# Altium PCB MotorControl-V4.0.PcbDoc (part 1 of 2)
Units mm, origin at the board's own origin, x right, y up, seen from the top; angles counter-clockwise.
Board outline 110 x 100 mm, 4 copper layers (Top Layer, GND-A, VCC-A, Bottom Layer); 241 components, 149 nets, 694 pads, 355 vias.
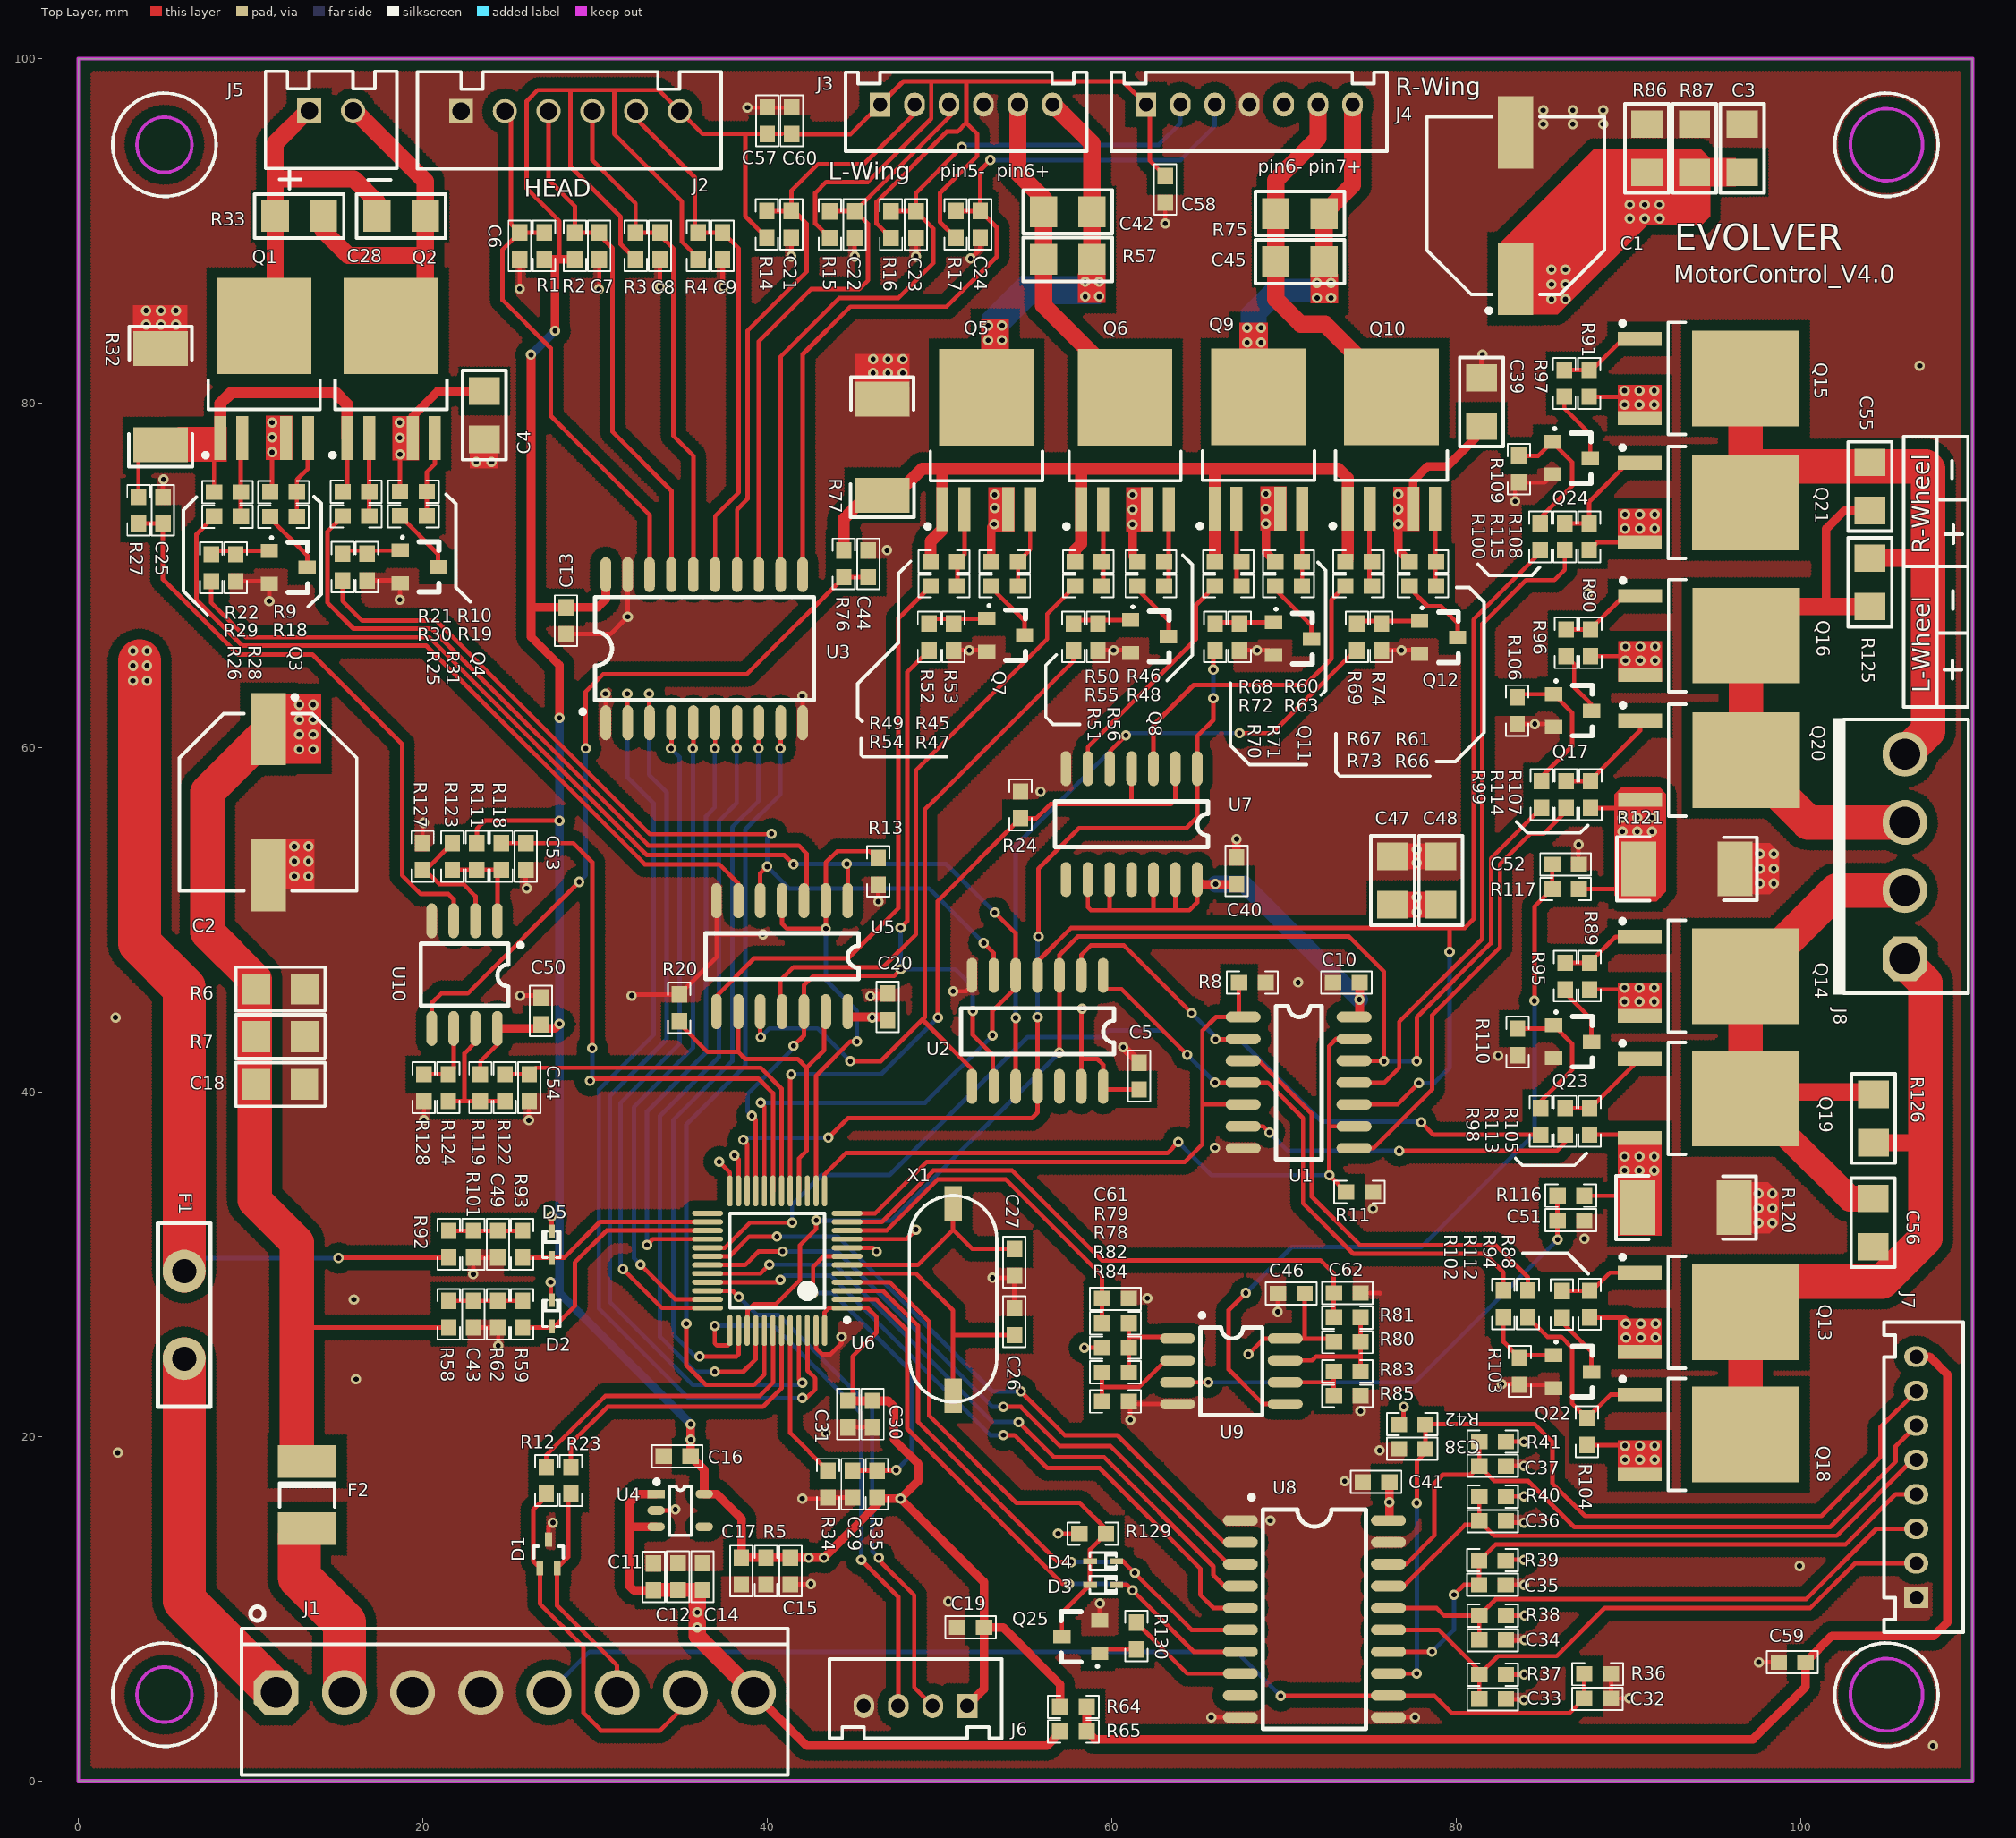
[diagram p0: Top Layer view]
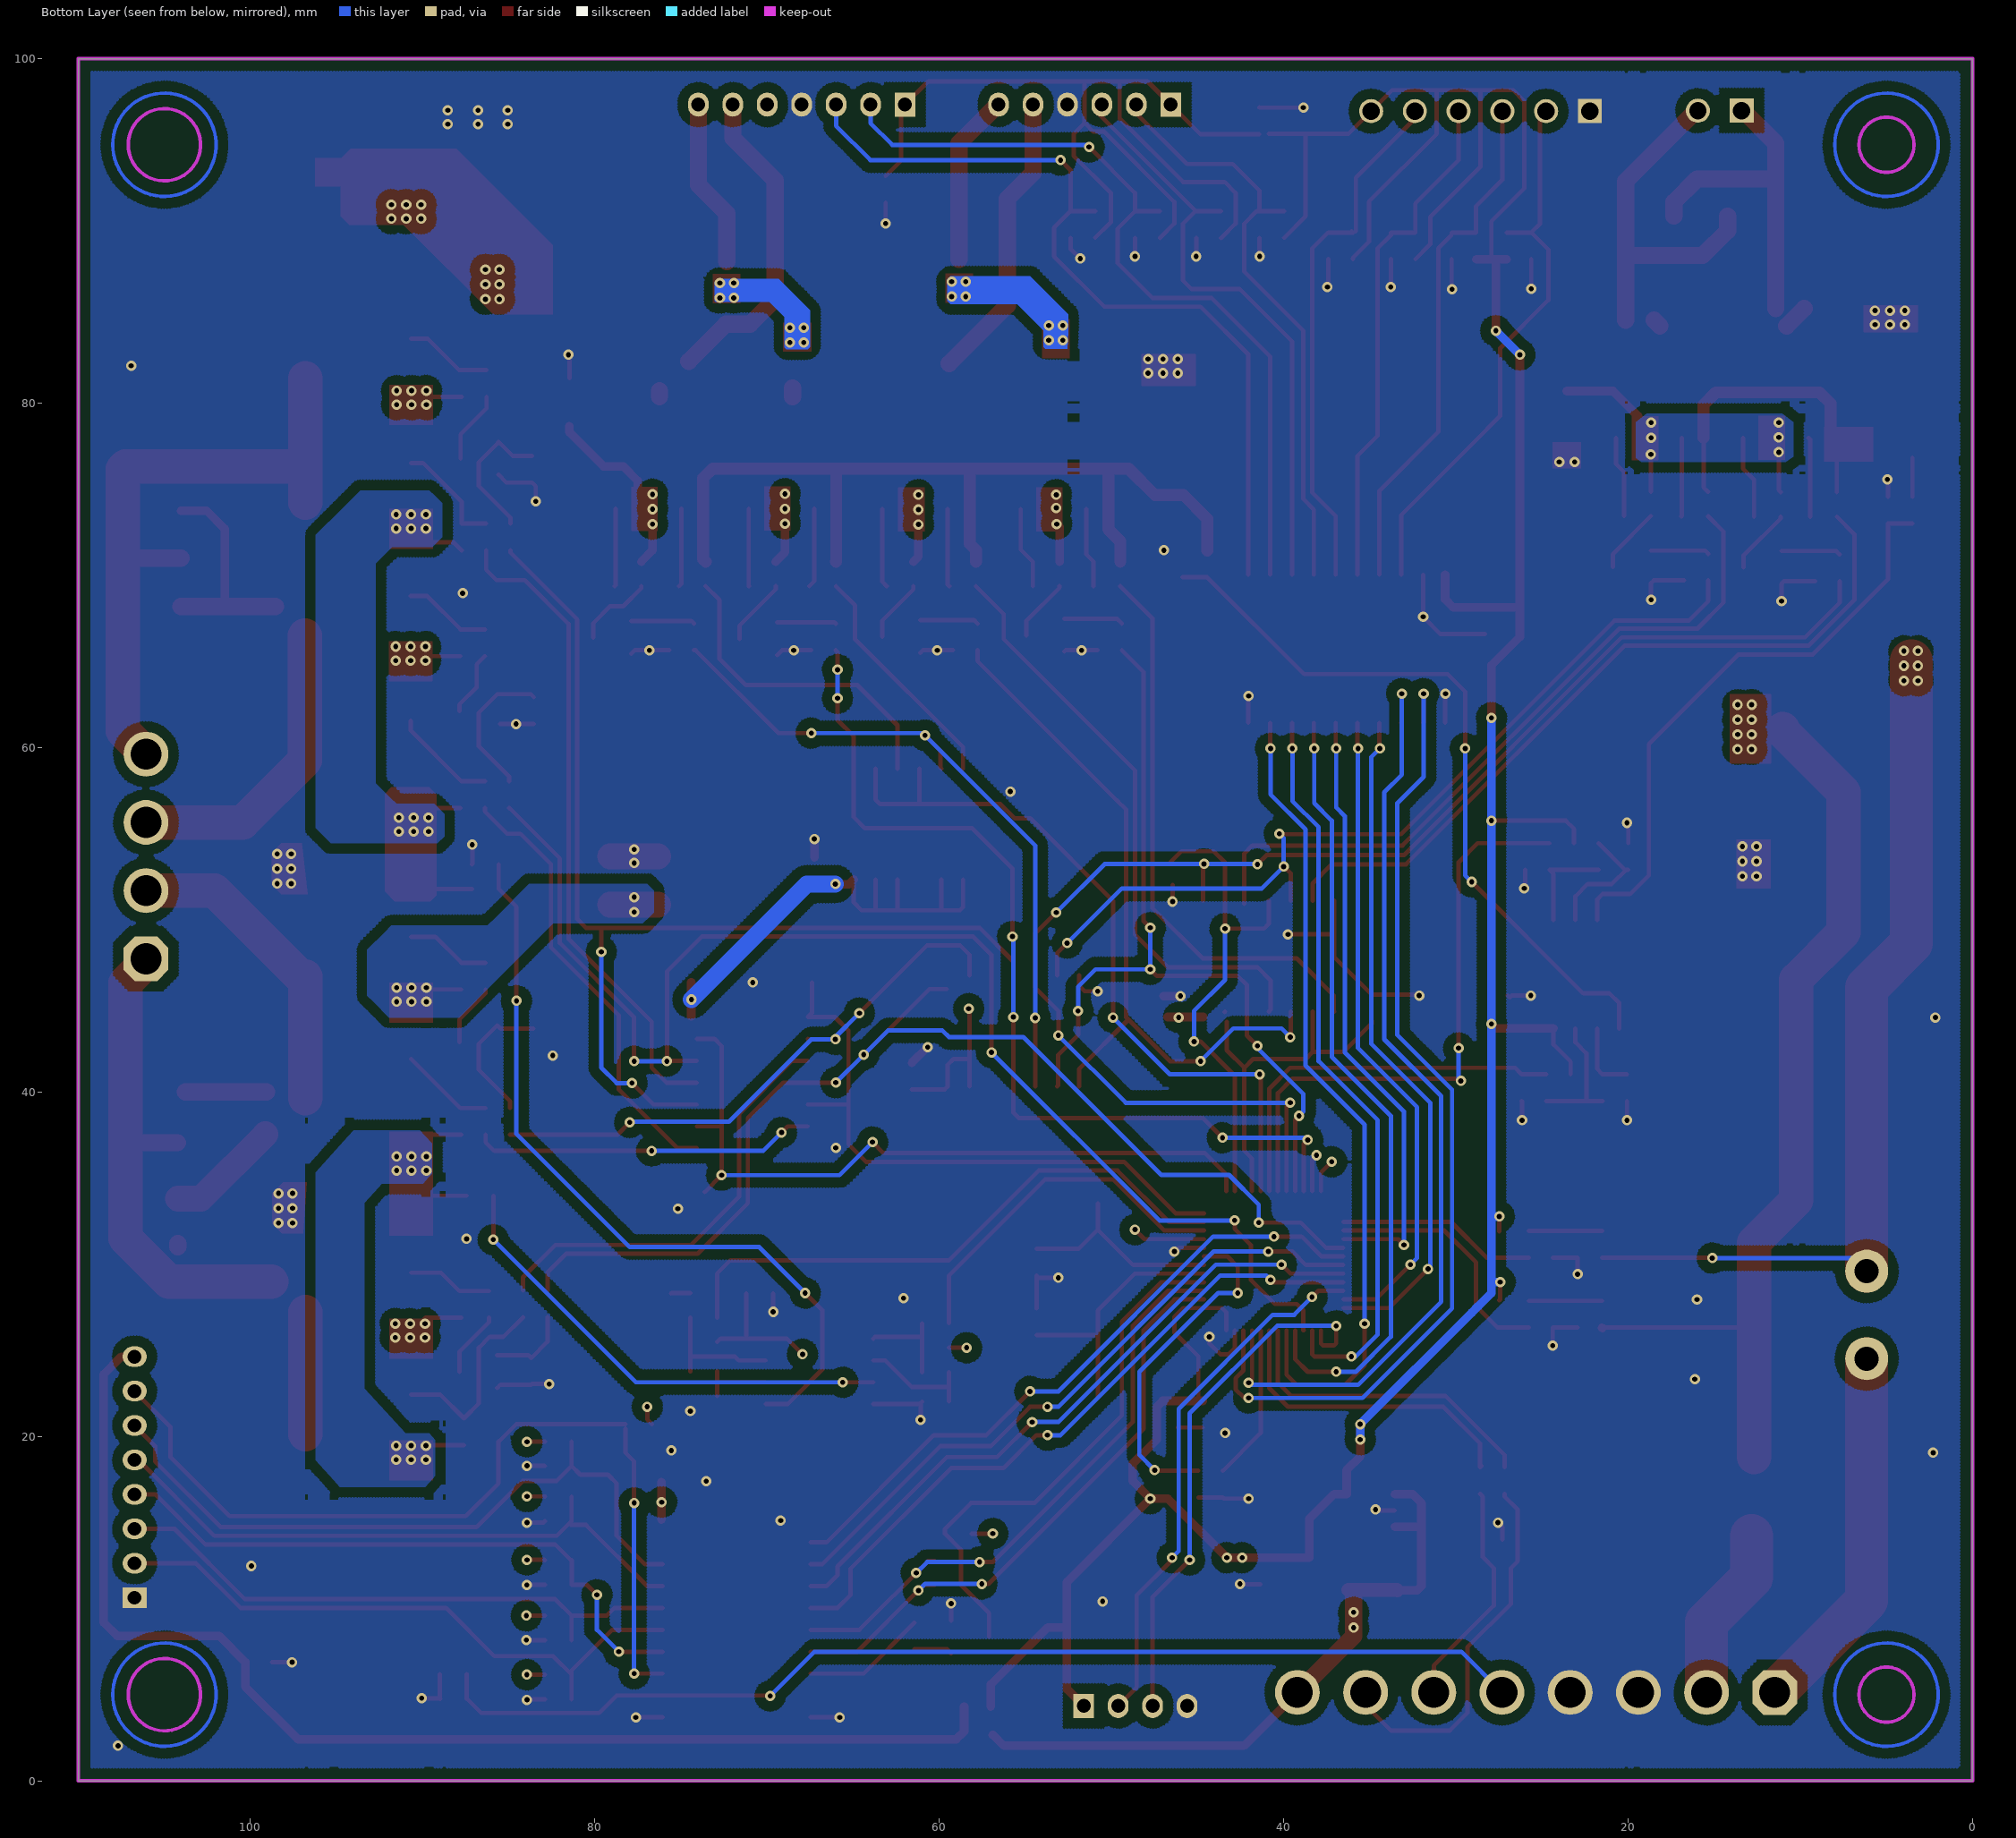
[diagram p1: Bottom Layer view, seen from below]
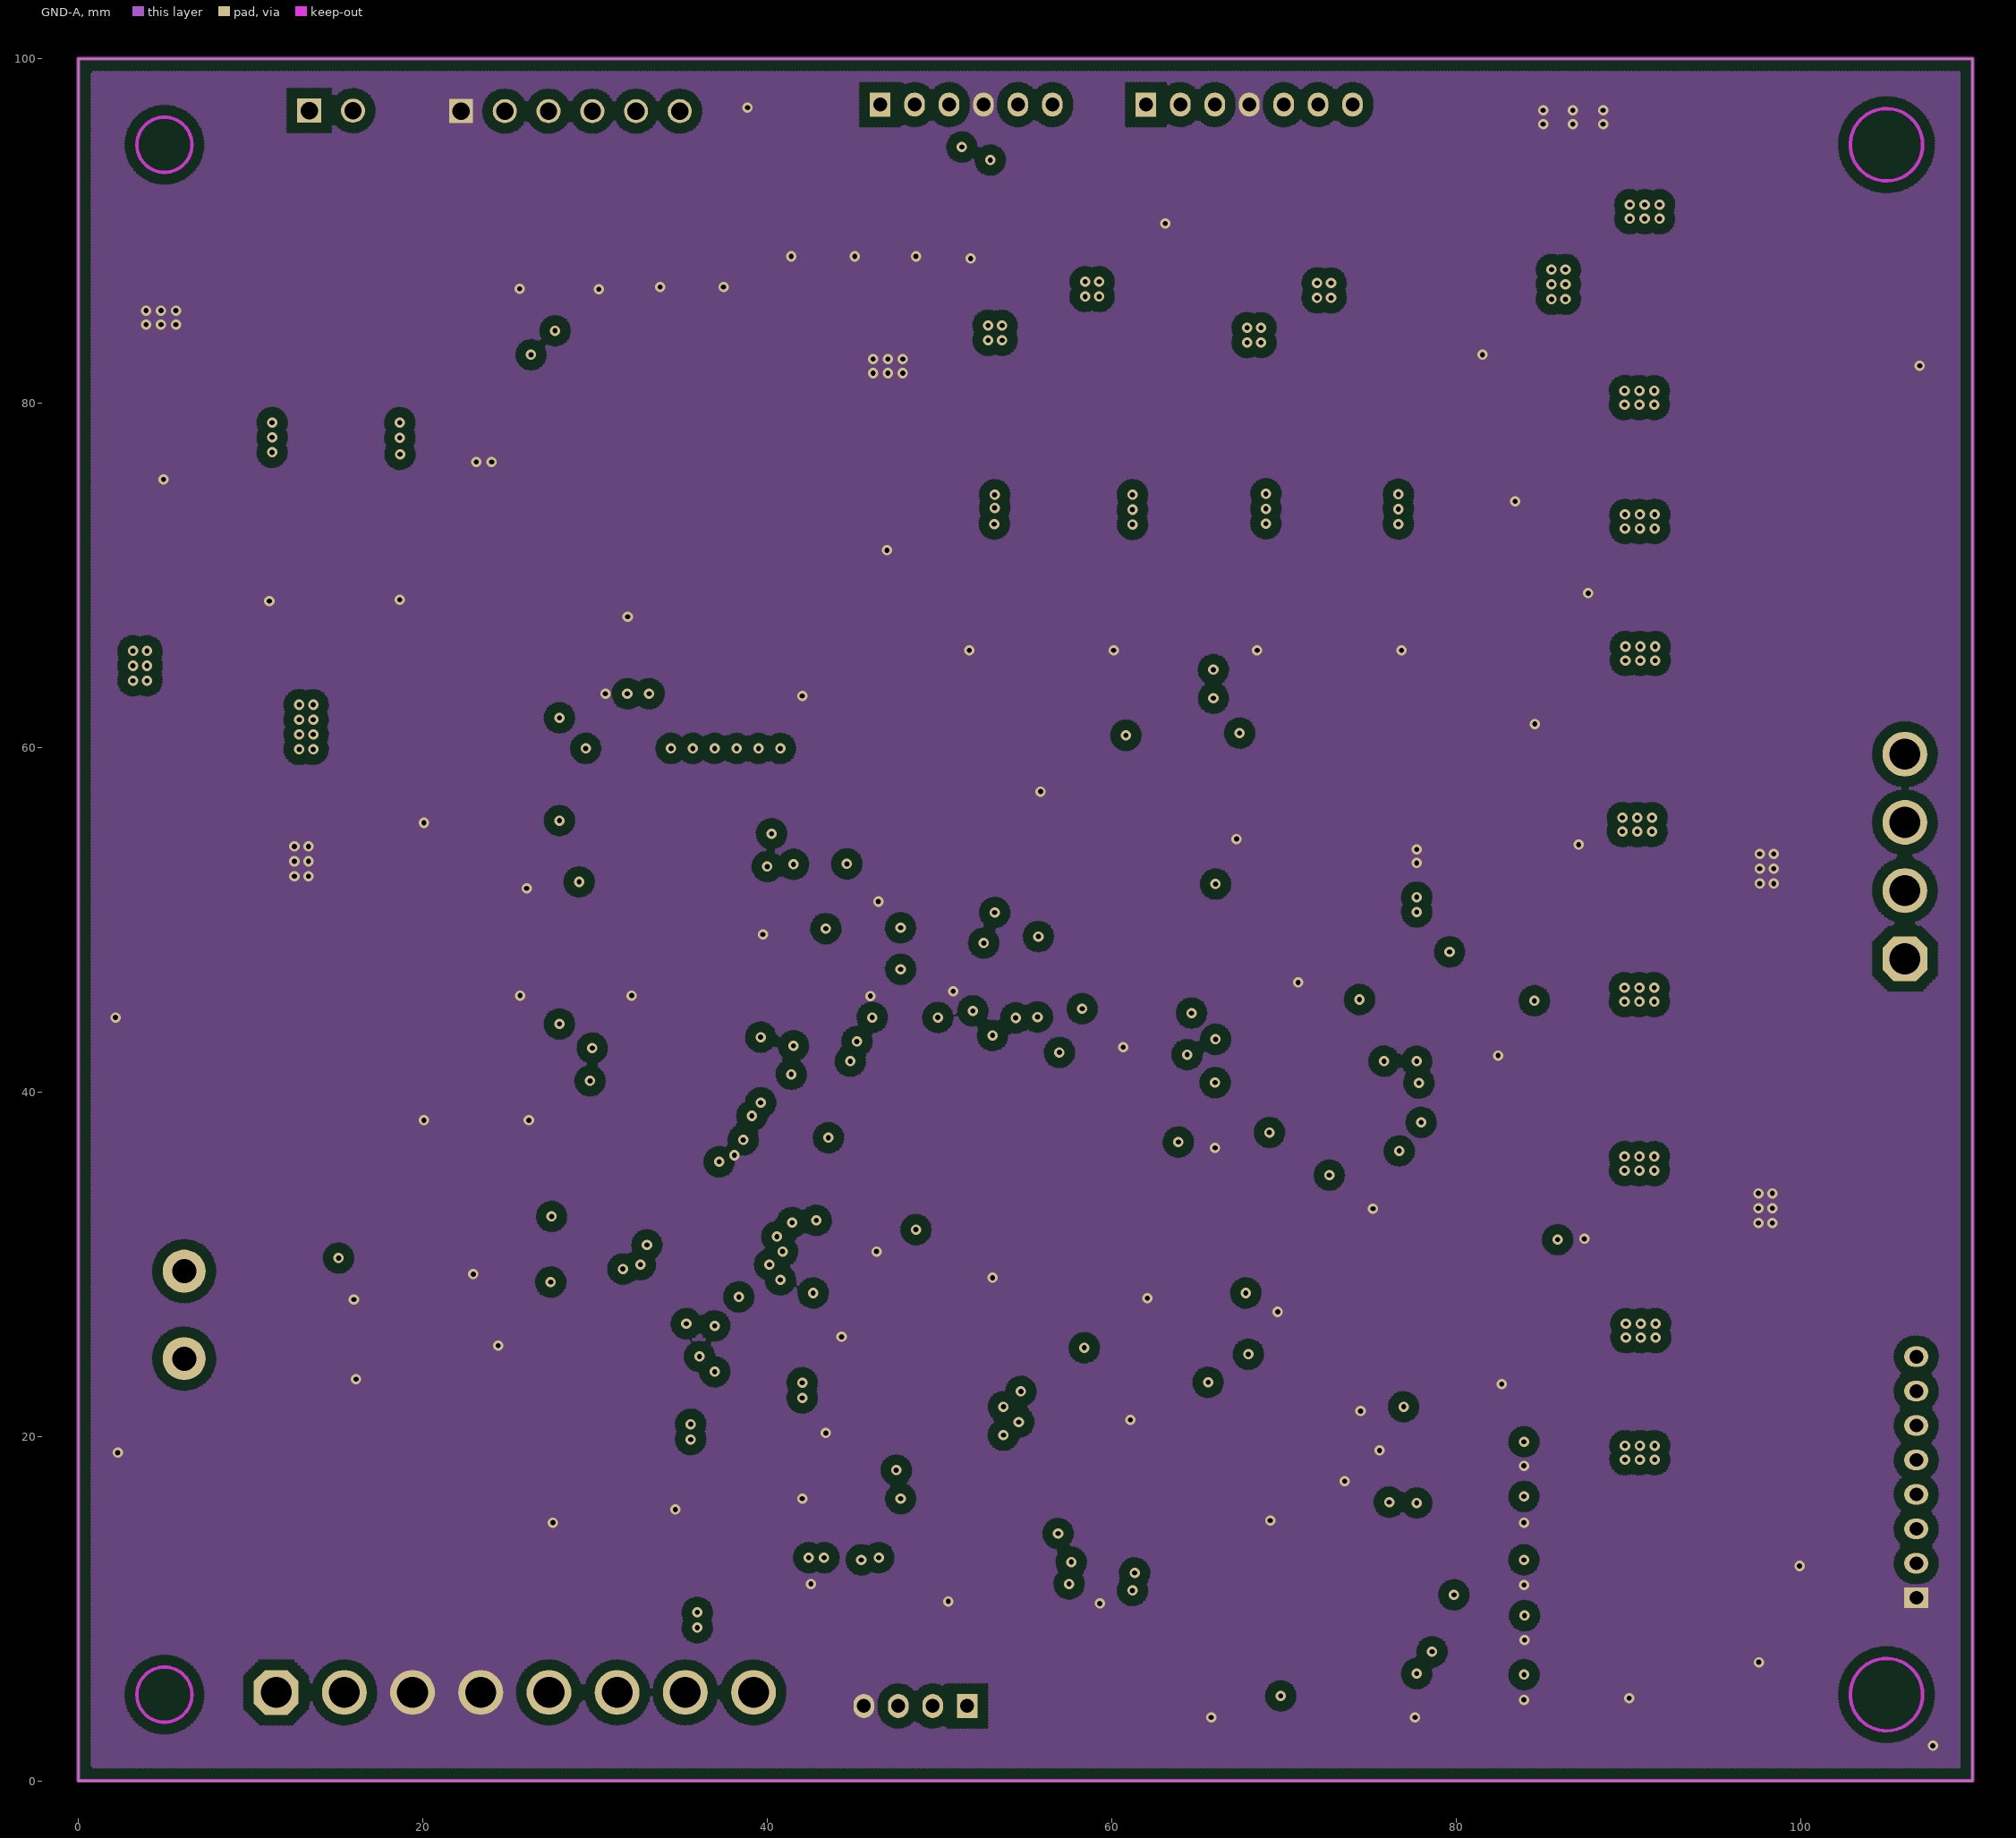
[diagram p2: GND-A]
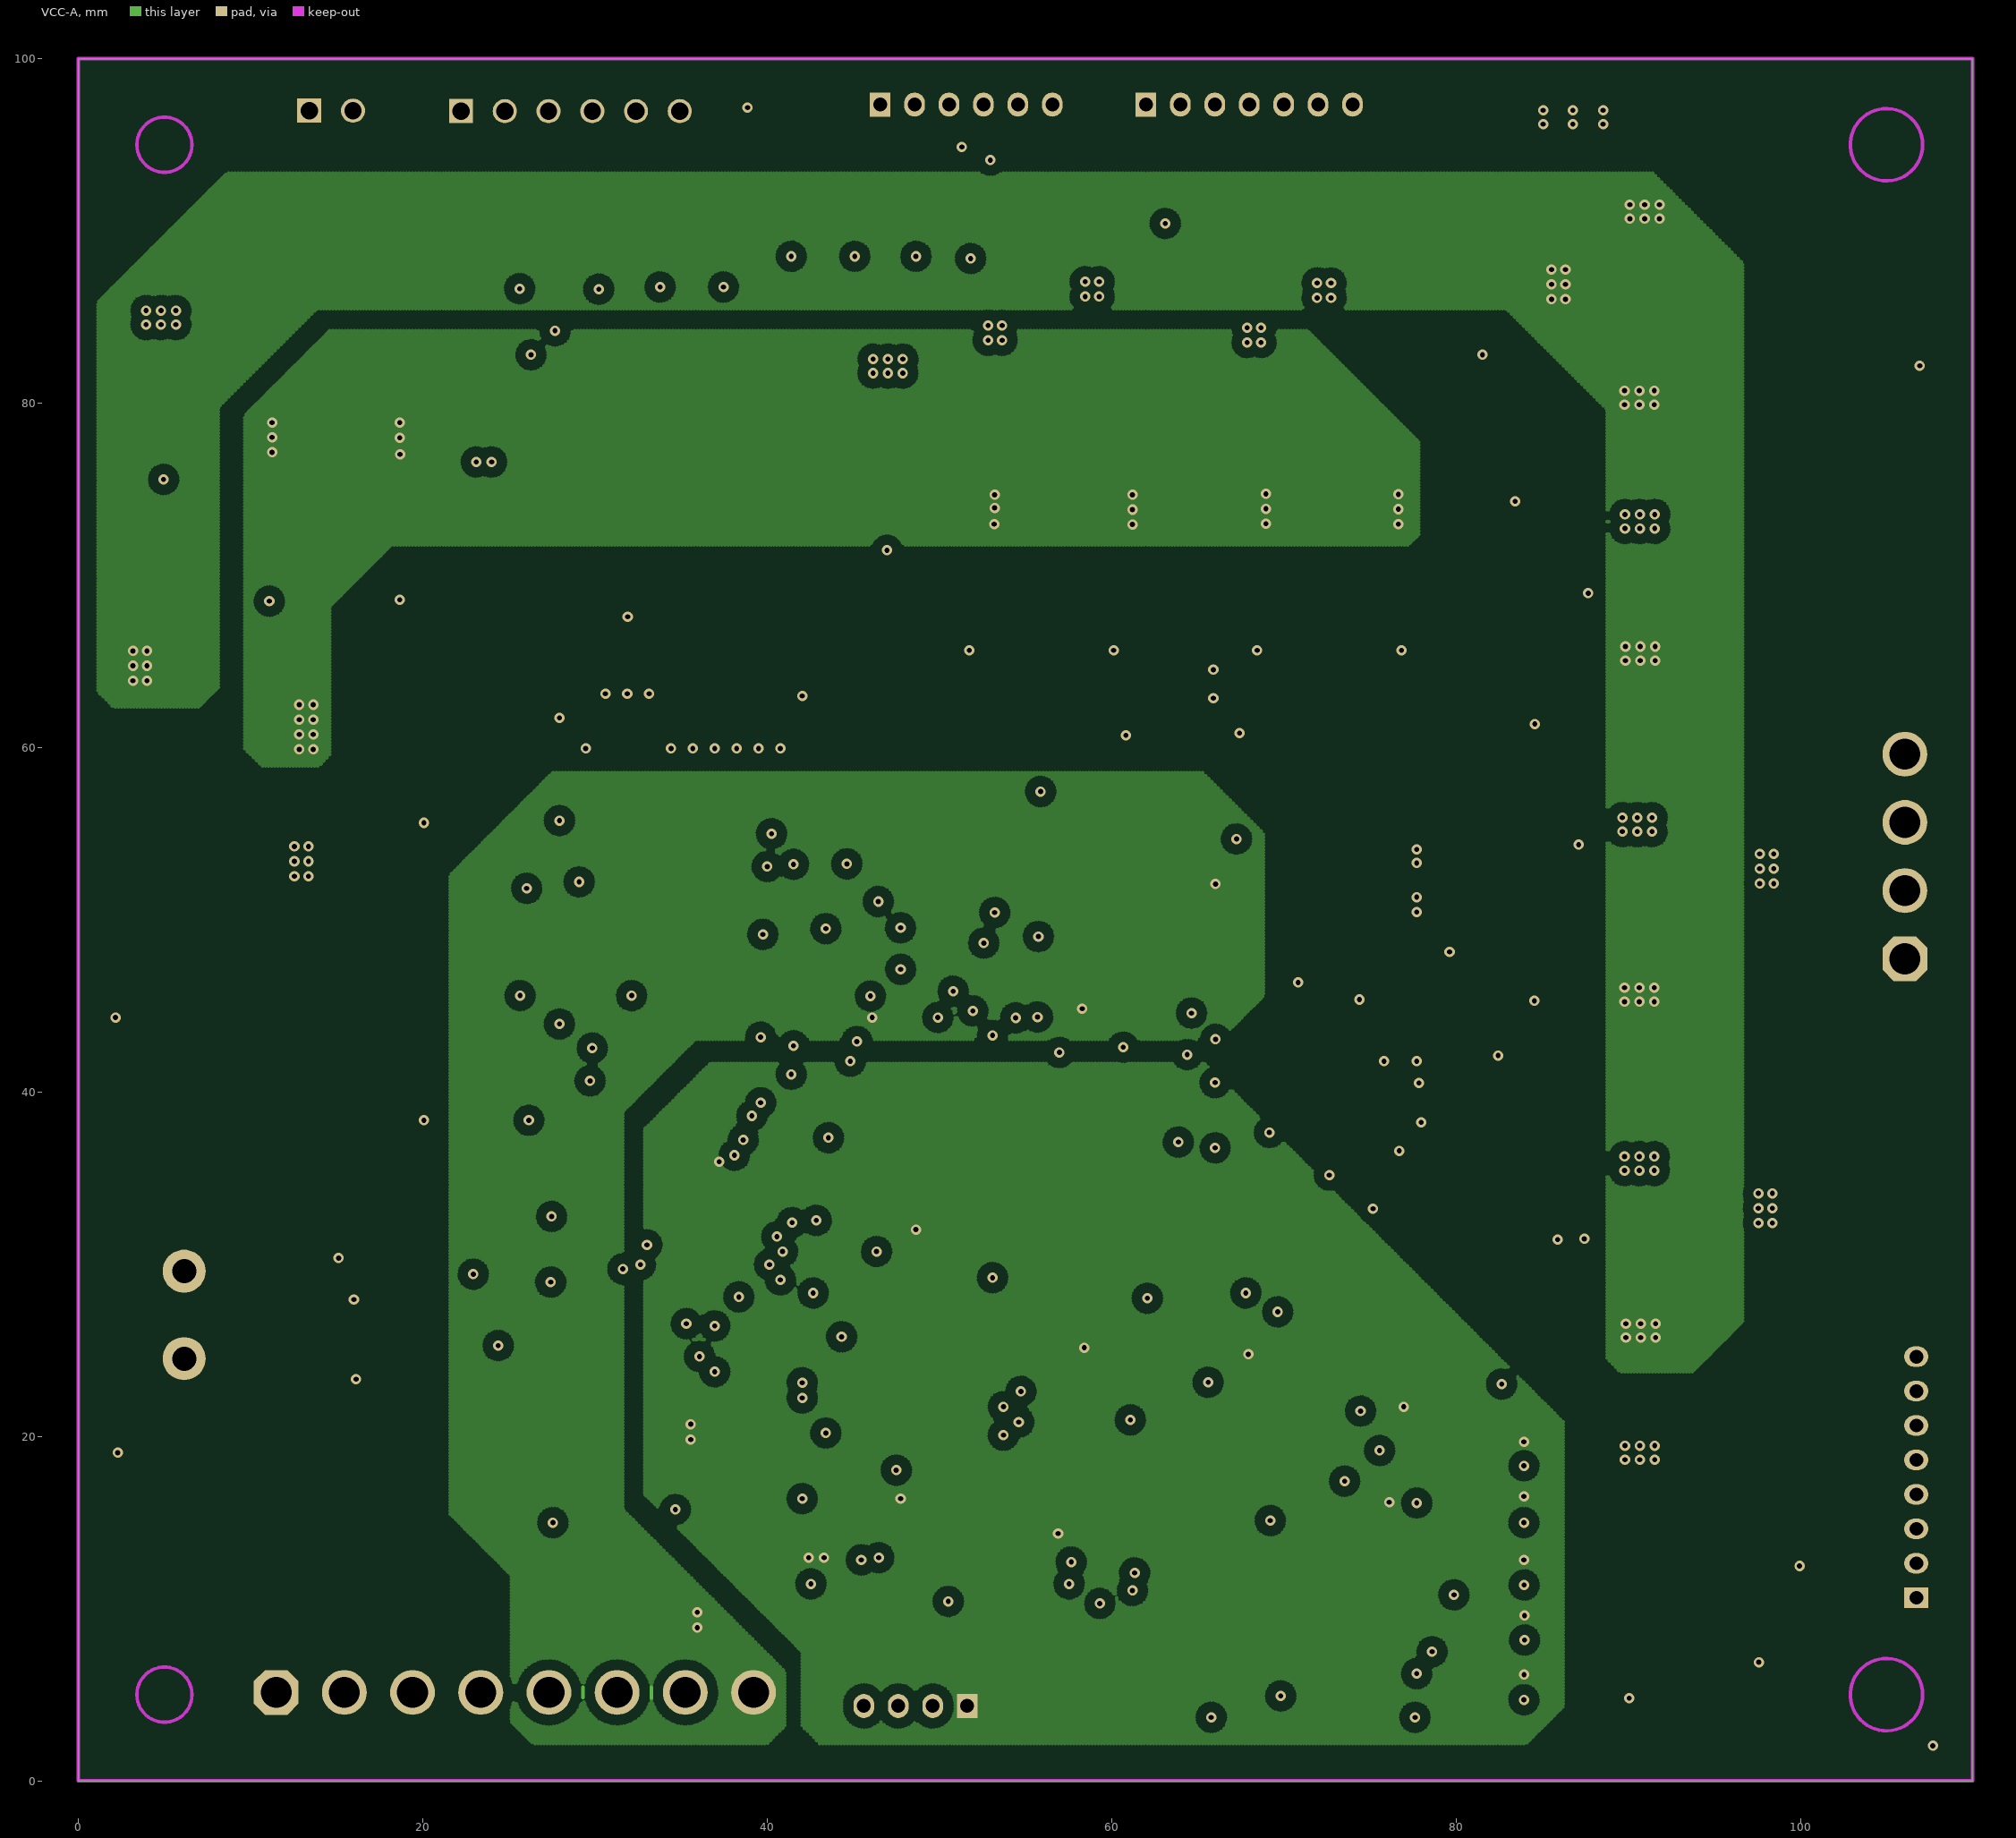
[diagram p3: VCC-A]

## Layer stack, top to bottom
Top Layer: signal copper 0.0356
Dielectric: core 0.32, FR-4, Dk 4.8
GND-A: signal copper 0.0356
Dielectric: prepreg 0.32, FR-4, Dk 4.8
VCC-A: signal copper 0.0356
Dielectric: core 0.32, FR-4, Dk 4.8
Bottom Layer: signal copper 0.0356

## Board outline
0,0 110,0 110,100 0,100

## Design rules (kind name [scope] priority, off if disabled: settings)
Clearance Clearance_1 [InPolygon] p1: gap=0.6
Clearance [All] p2: gap=0.2
ComponentClearance [All] p1: gap=0 collisioncheckmode=3 verticalgap=0 showdistances=FALSE
HoleSize [All] p1: absolutevalues=TRUE maxlimit=5 minlimit=0.025 maxpercent=80.000 minpercent=20.000
HoleToHoleClearance [All] p1: gap=0 allowstackedmicrovias=TRUE
MinimumSolderMaskSliver [All] p1: minsoldermaskwidth=0
PlaneConnect [All] p1: planeconnectstyle=Direct reliefexpansion=0.508 reliefentries=4 reliefconductorwidth=0.254 reliefairgap=0.254
PolygonConnect [All] p1: connectstyle=Direct reliefconductorwidth=0.254 reliefentries=4 polygonreliefangle="90 Angle"
RoutingVias [All] p1: holewidth=0.3 width=0.6 viastyle="Through Hole" minholewidth=0.3 minwidth=0.6 maxholewidth=0.3 maxwidth=0.6
SilkToSilkClearance [All] p1: silktosilkclearance=0
SilkscreenOverComponentPads [All] p1: minsilkscreentomaskgap=0
SolderMaskExpansion [All] p1: expansion=0
TestPointUsage [All] p1: valid=0 allowmultiple=FALSE
Testpoint [All] p1: side=3 testpointundercomponent=TRUE minsize=1.016 maxsize=2.54 preferedsize=1.524 minholesize=0 maxholesize=1.016 preferedholesize=0.813 testpointgrid=0.025 style=297 order=0-112345678
Width [All] p1: maxlimit=3 minlimit=0.2 preferedwidth=0.254
17 further rules are at their usual default settings.

## Components (designator, comment, footprint, x,y, rotation, side; value= is the part's Value field where it differs from the comment)
C1 "470uF/35V" CAP_SO_10*10 83.337,87.528 r180 top
C2 "470uF/35V" CAP_SO_10*10 11.151,60.757 r0 top
C3 "C1206" 1206 96.622,94.793 r90 top
C4 "C1206" 1206 23.571,79.299 r270 top
C5 "C0603" C0603_M1608 61.595,40.919 r90 top
C6 "C0603" C0603_M1608 25.629,89.129 r270 top
C7 "C0603" C0603_M1608 30.251,89.129 r270 top
C8 "C0603" C0603_M1608 33.782,89.129 r270 top
C9 "C0603" C0603_M1608 37.414,89.129 r270 top
C10 "C0603" C0603_M1608 73.635,46.355 r180 top
C11 "C0603" C0603_M1608 33.401,11.836 r270 top
C12 "C0603" C0603_M1608 34.823,11.849 r270 top
C13 "C0603" C0603_M1608 28.321,67.361 r270 top
C14 "C0603" C0603_M1608 36.246,11.849 r270 top
C15 "C0603" C0603_M1608 41.351,12.18 r270 top
C16 "C0603" C0603_M1608 34.773,18.847 r0 top
C17 "C0603" C0603_M1608 38.506,12.18 r90 top
C18 "C1206" 1206 11.735,40.437 r0 top
C19 "C0603" C0603_M1608 51.816,8.915 r180 top
C20 "C0603" C0603_M1608 46.99,44.933 r270 top
C21 "C0603" C0603_M1608 41.402,90.373 r270 top
C22 "C0603" C0603_M1608 45.085,90.36 r270 top
C23 "C0603" C0603_M1608 48.641,90.36 r270 top
C24 "C0603" C0603_M1608 52.375,90.373 r270 top
C25 "C0603" C0603_M1608 4.917,73.778 r90 top
C26 "C0603" C0603_M1608 54.356,26.657 r270 top
C27 "C0603" C0603_M1608 54.356,30.111 r90 top
C28 "1206" 1206 18.745,90.856 r180 top
C29 "C0603" C0603_M1608 44.958,17.221 r90 top
C30 "C0603" C0603_M1608 46.126,21.285 r270 top
C31 "C0603" C0603_M1608 44.704,21.285 r270 top
C32 "C0603" C0603_M1608 88.216,4.765 r0 top
C33 "C0603" C0603_M1608 82.133,4.739 r0 top
C34 "C0603" C0603_M1608 82.133,8.168 r0 top
C35 "C0603" C0603_M1608 82.121,11.379 r0 top
C36 "C0603" C0603_M1608 82.13,15.077 r0 top
C37 "C0603" C0603_M1608 82.133,18.278 r0 top
C38 "C0603" C0603_M1608 77.457,19.279 r180 top
C39 "C1206" 1206 81.483,80.061 r90 top
C40 "C0603" C0603_M1608 67.259,52.832 r90 top
C41 "C0603" C0603_M1608 75.362,17.348 r180 top
C42 "1206" 1206 57.455,91.11 r0 top
C43 "C0603" C0603_M1608 22.936,27.089 r270 top
C44 "C0603" C0603_M1608 45.872,70.661 r90 top
C45 "1206" 1206 70.939,88.214 r0 top
C46 "C0603" C0603_M1608 70.434,28.296 r180 top
C47 "C1206" 1206 76.327,52.273 r90 top
C48 "C1206" 1206 79.121,52.273 r90 top
C49 "C0603" C0603_M1608 24.359,31.153 r270 top
C50 "C0603" C0603_M1608 26.873,44.704 r90 top
C51 "C0603" C0603_M1608 86.674,32.55 r0 top
C52 "C0603" C0603_M1608 86.367,53.211 r0 top
C53 "C0603" C0603_M1608 25.984,53.67 r270 top
C54 "C0603" C0603_M1608 26.187,40.246 r270 top
C55 "1206" 1206 104.038,75.156 r270 top
C56 "1206" 1206 104.216,32.41 r270 top
C57 "C0603" C0603_M1608 40.005,96.393 r90 top
C58 "C0603" C0603_M1608 63.119,92.405 r270 top
C59 "C0603" C0603_M1608 99.53,6.883 r180 top
C60 "C0603" C0603_M1608 41.427,96.393 r90 top
C61 "C0603" C0603_M1608 60.223,27.991 r0 top
C62 "C0603" C0603_M1608 73.685,28.321 r0 top
D1 "RClamp0502B" SOT-523 27.305,13.183 r90 top
D2 "SOD523" SOD523 27.483,27.14 r90 top
D3 "SOD523" SOD523 59.512,11.379 r0 top
D4 "SOD523" SOD523 59.512,12.751 r0 top
D5 "SOD523" SOD523 27.483,31.128 r90 top
F1 "BK30-400" FUSE-FRG-5MM 6.147,27.051 r270 top
F2 "1812" 1812 13.284,16.586 r270 top
J1 "VH3.96-8P" VH3.96-8P 23.368,5.131 r0 top
J2 "XH2.54-6" XH2.54-6 28.575,96.952 r0 top
J3 "PH2.0-6P" PH2.0-6P 51.562,97.333 r0 top
J4 "PH2.0-7P" PH2.0-7P 67.996,97.333 r0 top
J5 "XH2.54-2" XH2.54-2 14.681,96.977 r0 top
J6 "PH2.0-4P" PH2.0-4P 48.616,4.343 r180 top
J7 "PH2.0-8P" PH2.0-8P 106.731,17.628 r90 top
J8 "VH3.96-4P" VH3.96-4P 106.07,53.67 r90 top
Q1 "TO-252-4" TO-252-4L 8.255,77.978 r90 top
Q2 "TO-252-4" TO-252-4L 15.621,77.978 r90 top
Q3 "SOT-23" SOT-23_L 12.192,70.46 r0 top
Q4 "SOT-23" SOT-23_L 19.787,70.485 r0 top
Q5 "TO-252-4" TO-252-4L 50.19,73.838 r90 top
Q6 "TO-252-4" TO-252-4L 58.242,73.838 r90 top
Q7 "SOT-23" SOT-23_L 53.848,66.523 r0 top
Q8 "SOT-23" SOT-23_L 62.205,66.446 r0 top
Q9 "TO-252-4" TO-252-4L 65.989,73.863 r90 top
Q10 "TO-252-4" TO-252-4L 73.711,73.863 r90 top
Q11 "SOT-23" SOT-23_L 70.51,66.319 r0 top
Q12 "SOT-23" SOT-23_L 78.994,66.396 r0 top
Q13 "D-PAK" TO-252-2L 94.675,27.203 r0 top
Q14 "D-PAK" TO-252-2L 94.675,46.711 r0 top
Q15 "D-PAK" TO-252-2L 94.675,81.432 r0 top
Q16 "D-PAK" TO-252-2L 94.7,66.497 r0 top
Q17 "SOT-23" SOT-23_L 86.775,62.141 r0 top
Q18 "D-PAK" TO-252-2L 94.675,20.117 r0 top
Q19 "D-PAK" TO-252-2L 94.675,39.624 r0 top
Q20 "D-PAK" TO-252-2L 94.7,59.258 r0 top
Q21 "D-PAK" TO-252-2L 94.675,74.219 r0 top
Q22 "SOT-23" SOT-23_L 86.775,23.762 r0 top
Q23 "SOT-23" SOT-23_L 86.775,42.914 r0 top
Q24 "SOT-23" SOT-23_L 86.699,76.797 r0 top
Q25 "SOT-23" SOT-23_L 58.217,8.357 r180 top
R1 "R0603" 0603 27.051,89.129 r270 top
R2 "R0603" 0603 28.829,89.129 r270 top
R3 "R0603" 0603 32.36,89.129 r270 top
R4 "R0603" 0603 35.992,89.129 r270 top
R5 "R0603" 0603 39.929,12.18 r90 top
R6 "R1206" 1206 11.738,45.974 r180 top
R7 "R1206" 1206 11.738,43.205 r180 top
R8 "R0603" 0603 68.174,46.355 r0 top
R9 "R0603" 0603 11.916,74.833 r180 top
R10 "R0603" 0603 19.458,74.856 r180 top
R11 "R0603" 0603 74.397,34.188 r0 top
R12 "R0603" 0603 27.178,17.438 r270 top
R13 "R0603" 0603 46.457,52.807 r270 top
R14 "R0603" 0603 39.98,90.373 r270 top
R15 "R0603" 0603 43.637,90.36 r270 top
R16 "R0603" 0603 47.193,90.36 r270 top
R17 "R0603" 0603 50.952,90.373 r270 top
R18 "R0603" 0603 11.914,73.396 r0 top
R19 "R0603" 0603 19.458,73.434 r0 top
R20 "R0603" 0603 34.9,44.882 r90 top
R21 "R0603" 0603 16.131,74.843 r180 top
R22 "R0603" 0603 8.661,74.828 r180 top
R23 "R0603" 0603 28.6,17.438 r270 top
R24 "R0603" 0603 54.712,56.667 r90 top
R25 "R0603" 0603 15.343,70.475 r90 top
R26 "R0603" 0603 7.722,70.434 r270 top
R27 "R0603" 0603 3.495,73.778 r90 top
R28 "R0603" 0603 9.144,70.434 r90 top
R29 "R0603" 0603 8.661,73.406 r180 top
R30 "R0603" 0603 16.131,73.421 r180 top
R31 "R0603" 0603 16.766,70.475 r270 top
R32 "R2512" R2512 4.775,77.572 r90 top
R33 "R1206" 1206 12.827,90.856 r180 top
R34 "R0603" 0603 43.536,17.221 r90 top
R35 "R0603" 0603 46.38,17.221 r270 top
R36 "R0603" 0603 88.227,6.198 r180 top
R37 "R0603" 0603 82.133,6.162 r0 top
R38 "R0603" 0603 82.133,9.591 r0 top
R39 "R0603" 0603 82.121,12.802 r0 top
R40 "R0603" 0603 82.13,16.5 r0 top
R41 "R0603" 0603 82.133,19.7 r0 top
R42 "R0603" 0603 77.457,20.701 r180 top
R45 "R0603" 0603 53.797,70.79 r180 top
R46 "R0603" 0603 62.281,70.79 r180 top
R47 "R0603" 0603 53.797,69.367 r0 top
R48 "R0603" 0603 62.281,69.367 r0 top
R49 "R0603" 0603 50.267,70.79 r0 top
R50 "R0603" 0603 58.649,70.79 r0 top
R51 "R0603" 0603 57.785,66.421 r90 top
R52 "R0603" 0603 49.403,66.421 r270 top
R53 "R0603" 0603 50.825,66.421 r90 top
R54 "R0603" 0603 50.267,69.367 r180 top
R55 "R0603" 0603 58.649,69.367 r180 top
R56 "R0603" 0603 59.207,66.421 r90 top
R57 "R1206" 1206 57.455,88.341 r0 top
R58 "R0603" 0603 21.514,27.089 r270 top
R59 "R0603" 0603 25.781,27.089 r90 top
R60 "R0603" 0603 70.282,70.79 r180 top
R61 "R0603" 0603 78.08,70.79 r180 top
R62 "R0603" 0603 24.359,27.089 r90 top
R63 "R0603" 0603 70.282,69.367 r0 top
R64 "R0603" 0603 57.785,4.293 r180 top
R65 "R0603" 0603 57.785,2.87 r180 top
R66 "R0603" 0603 78.08,69.367 r0 top
R67 "R0603" 0603 74.346,70.79 r0 top
R68 "R0603" 0603 66.777,70.79 r0 top
R69 "R0603" 0603 74.244,66.421 r90 top
R70 "R0603" 0603 66.015,66.421 r270 top
R71 "R0603" 0603 67.437,66.421 r90 top
R72 "R0603" 0603 66.777,69.367 r180 top
R73 "R0603" 0603 74.346,69.367 r180 top
R74 "R0603" 0603 75.667,66.421 r90 top
R75 "R1206" 1206 70.939,91.008 r0 top
R76 "R0603" 0603 44.45,70.661 r90 top
R77 "R2512" R2512 46.685,74.651 r90 top
R78 "R0603" 0603 60.223,25.146 r0 top
R79 "R0603" 0603 60.223,26.568 r180 top
R80 "R0603" 0603 73.685,25.476 r0 top
R81 "R0603" 0603 73.685,26.899 r0 top
R82 "R0603" 0603 60.223,23.724 r180 top
R83 "R0603" 0603 73.685,23.774 r180 top
R84 "R0603" 0603 60.223,22.022 r0 top
R85 "R0603" 0603 73.685,22.352 r0 top
R86 "R1206" 1206 91.084,94.793 r270 top
R87 "R1206" 1206 93.853,94.793 r270 top
R88 "R0603" 0603 87.766,27.674 r270 top
R89 "R0603" 0603 87.766,46.724 r270 top
R90 "R0603" 0603 87.817,66.078 r270 top
R91 "R0603" 0603 87.741,81.141 r270 top
R92 "R0603" 0603 21.514,31.153 r270 top
R93 "R0603" 0603 25.781,31.153 r90 top
R94 "R0603" 0603 86.157,27.661 r90 top
R95 "R0603" 0603 86.344,46.724 r90 top
R96 "R0603" 0603 86.394,66.078 r90 top
R97 "R0603" 0603 86.293,81.141 r90 top
R98 "R0603" 0603 84.921,38.291 r90 top
R99 "R0603" 0603 84.972,57.265 r270 top
R100 "R0603" 0603 84.896,72.225 r90 top
R101 "R0603" 0603 22.936,31.153 r90 top
R102 "R0603" 0603 82.753,27.686 r90 top
R103 "R0603" 0603 83.702,23.774 r90 top
R104 "R0603" 0603 87.605,20.269 r270 top
R105 "R0603" 0603 87.766,38.291 r270 top
R106 "R0603" 0603 83.55,62.141 r90 top
R107 "R0603" 0603 87.817,57.265 r270 top
R108 "R0603" 0603 87.741,72.225 r270 top
R109 "R0603" 0603 83.651,76.162 r90 top
R110 "R0603" 0603 83.575,42.901 r90 top
R111 "R0603" 0603 23.139,53.67 r90 top
R112 "R0603" 0603 84.176,27.686 r270 top
R113 "R0603" 0603 86.344,38.291 r90 top
R114 "R0603" 0603 86.394,57.265 r90 top
R115 "R0603" 0603 86.318,72.225 r90 top
R116 "R0603" 0603 86.674,33.973 r180 top
R117 "R0603" 0603 86.367,51.789 r180 top
R118 "R0603" 0603 24.562,53.67 r90 top
R119 "R0603" 0603 23.343,40.246 r90 top
R120 "R2512" R2512 90.56,33.274 r0 top
R121 "R2512" R2512 90.611,52.959 r0 top
R122 "R0603" 0603 24.765,40.246 r270 top
R123 "R0603" 0603 21.717,53.67 r270 top
R124 "R0603" 0603 21.488,40.246 r270 top
R125 "R1206" 1206 104.038,69.593 r270 top
R126 "R1206" 1206 104.242,38.456 r270 top
R127 "R0603" 0603 19.99,53.67 r270 top
R128 "R0603" 0603 20.066,40.246 r90 top
R129 "R0603" 0603 58.903,14.351 r0 top
R130 "R0603" 0603 61.443,8.407 r90 top
U1 "SO-14" SO-14 67.64,44.348 r0 top
U2 "SO-14" SO-14 59.512,46.761 r270 top
U3 "SOP-20" SOP-20 36.347,65.735 r90 top
U4 "XC6503D331" SOT23-5 34.95,15.697 r0 top
U5 "SO-14" SO-14 44.679,51.105 r270 top
U6 "LQFP48_N" LQFP48_N 40.589,30.201 r180 top
U7 "SO-14" SO-14 64.973,58.776 r270 top
U8 "SOP-20" SOP-20 71.78,9.398 r0 top
U9 "SO-8" SO-8 63.83,25.679 r0 top
U10 "SO-8" SO-8 24.333,49.936 r270 top
X1 "8M" HC-49SMD 50.8,27.94 r270 top

## Footprints (in the part's own frame and the unit in brackets; to place one, negate y for a bottom-side part, rotate by r counter-clockwise, add the part's x,y. Pads: shape width x height; smd on the part's side, far side on the other; paste and mask are expansions set on the pad)
0603 [mm]
  rect 0.95x0.9 smd: 1(-0.775,0) 2(0.775,0)
  silkscreen extent -1.48,-0.65 1.48,0.65
1206 [mm] "3216mm"
  rect 1.6x1.8 smd: 1(-1.4,0) 2(1.4,0)
  silkscreen extent -2.59,-1.27 2.59,1.27
1812 [mm] "Chip Capacitor; Body 4.5 x 3.2 mm (LxW typ)"
  rect 1.9x3.4 smd: 1(-1.95,0) 2(1.95,0)
  silkscreen extent -0.7,-1.6 0.7,1.6
C0603_M1608 [mm] "Chip Capacitor, 2-Leads, Body 1.6x0.8mm, IPC Medium Density"
  rect 0.95x0.9 smd: 1(-0.775,0) 2(0.775,0)
  silkscreen extent -1.48,-0.65 1.48,0.65
CAP_SO_10*10 [mm]
  rect 2.05x4.2 smd: 1(-0.127,0.313) 2(-0.127,-8.187)
  silkscreen extent -5.28,-9.09 5.02,2.29
FUSE-FRG-5MM [mm]
  round 2.5 hole 1.4: 1(-2.54,0) 2(2.54,0)
  silkscreen extent -5.33,-1.52 5.33,1.52
HC-49SMD [mm]
  rect 2x1 smd: 1(-5.588,0) 2(5.588,0)
  silkscreen extent -6.04,-2.54 5.94,2.54
LQFP48_N [mm]
  oval 1.8x0.3 smd: 1(-4.05,2.75) 2(-4.05,2.25) 3(-4.05,1.75) 4(-4.05,1.25) 5(-4.05,0.75) 6(-4.05,0.25) 7(-4.05,-0.25) 8(-4.05,-0.75) 9(-4.05,-1.25) 10(-4.05,-1.75) 11(-4.05,-2.25) 12(-4.05,-2.75) 25(4.05,-2.75) 26(4.05,-2.25) 27(4.05,-1.75) 28(4.05,-1.25) 29(4.05,-0.75) 30(4.05,-0.25) 31(4.05,0.25) 32(4.05,0.75) 33(4.05,1.25) 34(4.05,1.75) 35(4.05,2.25) 36(4.05,2.75)
  oval 0.3x1.8 smd: 13(-2.75,-4.05) 14(-2.25,-4.05) 15(-1.75,-4.05) 16(-1.25,-4.05) 17(-0.75,-4.05) 18(-0.25,-4.05) 19(0.25,-4.05) 20(0.75,-4.05) 21(1.25,-4.05) 22(1.75,-4.05) 23(2.25,-4.05) 24(2.75,-4.05) 37(2.75,4.05) 38(2.25,4.05) 39(1.75,4.05) 40(1.25,4.05) 41(0.75,4.05) 42(0.25,4.05) 43(-0.25,4.05) 44(-0.75,4.05) 45(-1.25,4.05) 46(-1.75,4.05) 47(-2.25,4.05) 48(-2.75,4.05)
  silkscreen extent -4.18,-2.75 2.75,3.57
PH2.0-4P [mm]
  rect 1.2x1.4 hole 0.8: 1(-3,0)
  oval 1.2x1.4 hole 0.8: 2(-1,0) 3(1,0) 4(3,0)
  silkscreen extent -5.01,-2.72 5,1.88
PH2.0-6P [mm]
  rect 1.2x1.4 hole 0.8: 1(-5,0)
  oval 1.2x1.4 hole 0.8: 2(-3,0) 3(-1,0) 4(1,0) 5(3,0) 6(5,0)
  silkscreen extent -7.01,-2.72 7,1.88
PH2.0-7P [mm]
  rect 1.2x1.4 hole 0.8: 1(-6,0)
  oval 1.2x1.4 hole 0.8: 2(-4,0) 3(-2,0) 4(0,0) 5(2,0) 6(4,0) 7(6,0)
  silkscreen extent -8.01,-2.72 8,1.88
PH2.0-8P [mm]
  rect 1.2x1.4 hole 0.8: 1(-7,0)
  oval 1.2x1.4 hole 0.8: 2(-5,0) 3(-3,0) 4(-1,0) 5(1,0) 6(3,0) 7(5,0) 8(7,0)
  silkscreen extent -9.01,-2.72 9,1.88
R2512 [mil]
  rect 80x125 smd: 1(0,0) 2(220,0)
  silkscreen extent -50,-73 270,73
SO-8 [mil]
  oval 80x24 smd: 1(0,0) 2(0,-50) 3(0,-100) 4(0,-150) 5(246.18,-150) 6(246.18,-100) 7(246.18,-50) 8(246.18,0)
  silkscreen extent 51,-175 194,58
SO-14 [mil]
  oval 80x24 smd: 1(0,0) 2(0,-50) 3(0,-100) 4(0,-150) 5(0,-200) 6(0,-250) 7(0,-300) 8(253.66,-300) 9(253.66,-250) 10(253.66,-200) 11(253.66,-150) 12(253.66,-100) 13(253.66,-50) 14(253.66,0)
  silkscreen extent 75,-325 180,25
SOD523 [mm]
  rect 0.8x0.35 smd: 1(-0.762,0) 2(0.762,0)
  silkscreen extent -0.76,-0.51 0.76,0.51
SOP-20 [mil]
  oval 80x24 smd: 1(-169.29,225) 2(-169.29,175) 3(-169.29,125) 4(-169.29,75) 5(-169.29,25) 6(-169.29,-25) 7(-169.29,-75) 8(-169.29,-125) 9(-169.29,-175) 10(-169.29,-225) 11(169.29,-225) 12(169.29,-175) 13(169.29,-125) 14(169.29,-75) 15(169.29,-25) 16(169.29,25) 17(169.29,75) 18(169.29,125) 19(169.29,175) 20(169.29,225)
  silkscreen extent -149,-251 118,283
SOT23-5 [mil] "SOT23, 5-Leads, Body 3.1x3.0mm (max), Pitch 0.95mm, IPC Medium Density"
  rect 40x20 smd: 1(-55,37.4)
  oval 40x20 smd: 2(-55,0) 3(-55,-37.4) 4(55,-37.4) 5(55,37.4)
  silkscreen extent -59,-57 26,70
SOT-23_L [mm]
  rect 1x0.8 smd: 1(-1.1,0.953) 2(-1.1,-0.953) 3(1.1,-0.013)
  silkscreen extent -0.97,-1.46 1.14,1.71
SOT-523 [mm] "SOT23, 3-Leads, Body 1.7x1.8mm (max), Pitch 0.50mm, IPC Medium Density"
  rect 0.85x0.4 smd: 1(-0.825,0.5) 2(-0.825,-0.5) 3(0.825,0)
  silkscreen extent -0.25,-0.85 0.43,0.85
TO-252-2L [mm]
  rect 2.55x0.8 smd: 1(-4,2.3) 2(-4,-2.3)
  rect 6.25x5.55 smd: 3(2.15,0)
  silkscreen extent -5.12,-3.25 -1.35,3.32
TO-252-4L [mm]
  rect 2.55x0.7 smd: 1(0,0) 2(0,-1.27) 3(0,-3.81) 4(0,-5.08)
  rect 5.6x5.5 smd: 5(6.5,-2.54)
  silkscreen extent -1.12,-5.79 3.35,0.98
VH3.96-4P [mm]
  oct 2.6x2.6 hole 1.8: 1(-5.94,0)
  round 2.6 hole 1.8: 2(-1.98,0) 3(1.98,0) 4(5.94,0)
  silkscreen extent -8.02,-3.68 8.03,4.19
VH3.96-8P [mm]
  oct 2.6x2.6 hole 1.8: 1(-11.88,0)
  round 2.6 hole 1.8: 2(-7.92,0) 3(-3.96,0) 4(0,0) 5(3.96,0) 6(7.92,0) 7(11.88,0) 8(15.84,0)
  silkscreen extent -13.89,-4.8 17.84,4.97
XH2.54-2 [mm]
  rect 1.4x1.4 hole 1: 1(-1.27,0)
  round 1.4 hole 1: 2(1.27,0)
  silkscreen extent -3.81,-3.35 3.81,2.29
XH2.54-6 [mm]
  rect 1.4x1.4 hole 1: 1(-6.35,0)
  round 1.4 hole 1: 2(-3.81,0) 3(-1.27,0) 4(1.27,0) 5(3.81,0) 6(6.35,0)
  silkscreen extent -8.89,-3.35 8.76,2.29

## Part data
C1 C2: library part "Cap Pol3", "Polarized Capacitor (Surface Mount)"
C3 C4 C5 C6 C7 C8 C9 C10 C11 C12 C13 C14 C15 C16 C17 C18 C19 C20 C21 C22 C23 C24 C25 C26 C27 C28 C29 C30 C31 C32 C33 C34 C35 C36 C37 C38 C39 C40 C41 C42 C43 C44 C45 C46 C47 C48 C49 C50 C51 C52 C53 C54 C55 C56 C57 C58 C59 C60 C61 C62: library part Cap, "Capacitor"
D1: library part LCTVS
D2 D3 D4 D5: library part DIODE, "Default Diode"
F1 F2: library part PPTC
J2: library part PH2.0-6P, "Header, 6-Pin"
J3 J7: "Header, 6-Pin"
J4: "Header, 7-Pin"
J5: library part XH2P, "Header, 2-Pin"
J6: library part "Header 4", "Header, 4-Pin"
J8: "Header, 3-Pin"
Q1 Q2 Q5 Q6 Q9 Q10: library part MOS-DUAL-N/P
Q3 Q4 Q7 Q8 Q11 Q12 Q17 Q22 Q23 Q24 Q25: library part NPN, "NPN Bipolar Transistor"
Q13 Q14 Q15 Q16: library part MOS-P, "P-Channel MOSFET"
Q18 Q19 Q20 Q21: library part MOS-N, "N-Channel MOSFET"
R1 R2 R3 R4 R5 R6 R7 R8 R9 R10 R11 R12 R13 R14 R15 R16 R17 R18 R19 R20 R21 R22 R23 R24 R25 R26 R27 R28 R29 R30 R31 R32 R33 R34 R35 R36 R37 R38 R39 R40 R41 R42 R45 R46 R47 R48 R49 R50 R51 R52 R53 R54 R55 R56 R57 R58 R59 R60 R61 R62 R63 R64 R65 R66 R67 R68 R69 R70 R71 R72 R73 R74 R75 R76 R77 R78 R79 R80 R81 R82 R83 R84 R85 R86 R87 R88 R89 R90 R91 R92 R93 R94 R95 R96 R97 R98 R99 R100 R101 R102 R103 R104 R105 R106 R107 R108 R109 R110 R111 R112 R113 R114 R115 R116 R117 R118 R119 R120 R121 R122 R123 R124 R125 R126 R127 R128 R129 R130: library part Res1, "Resistor"
U1 U5 U7: library part SN74AHCT08N, "Quadruple 2-Input Positive-AND Gate"
U2: library part SN74ACT14N, "Hex Schmitt-Trigger Inverter"
U3 U8: library part 74HC245
U4: library part XC9216A33
U6: library part STM32F103C8T6, "STM32 ARM-based 32-bit MCU with 64 Kbytes Flash, 48-pin LQFP, Industrial Temperature"
U9 U10: library part OP
X1: library part XTAL

## Via types
v1: diameter 0.6, hole 0.3, Top Layer to Bottom Layer, 352 vias
v2: diameter 0.6, hole 0.3, Top Layer to Bottom Layer, tented both sides, 3 vias

## Nets (pads, with @x,y where several pads share a name; then routed paths per layer and width w, separated by ;. In a path a pad name is that pad's centre, name@x,y a point inside that pad or via, vN(x,y) a via of type N, cw(c..) or ccw(c..) an arc to the next point about the centre after c; other vN are vias at no path point)
3.3V: C13.1 C15.1 C16.2 C17.2 C19.1 C30.1 C31.1 C41.1 C46.1 C50.1 C57.1 C58.1 C60.1 D2.2 D5.2 J2.6 J3.1 J4.1 J6.1 R1.2 R2.2 R3.2 R4.2 R5.2 R14.2 R15.2 R16.2 R17.2 R35.2 R37.2 R38.2 R39.2 R40.2 R41.2 R42.2 R64.2 R78.1 R80.1 R111.2 R119.2 R129.1 U3.20 U4.5 U6.1 U6.9 U6.24 U6.48 U8.20 U9.8 U10.8 | length 300.9
  Top Layer w0.254: R111.2@23.139,54.445 23.139,55.27 23.622,55.753 v1(27.94,55.753) ; R119.2@23.343,41.021 23.343,41.758 24.333,42.748 U10.8@24.333,43.683 ; v1(27.432,28.956) 27.432,27.953 D2.2@27.483,27.902 ; D5.2@27.483,31.89 v1(27.483,32.766) ; 27.94,88.354 27.94,90.551 26.035,92.456 26.035,97.028 26.035,97.536 26.67,98.171 28.829,98.171 ; 31.115,98.171 31.115,95.631 35.052,91.694 35.052,89.367 35.992,88.427 R4.2@35.992,88.354 ; R3.2@32.36,88.354 31.496,89.217 31.496,90.805 28.575,93.726 28.575,98.171 28.829,98.171 ; v1(37.211,35.941) 37.839,35.313 U6.24@37.839,34.251 ; R14.2@39.98,89.598 38.735,90.843 38.735,95.631 ; 40.881,95.631 38.735,95.631 ; C60.1@41.427,95.618 44.847,95.618 47.908,98.679 60.65,98.679 J4.1@61.996,97.333 62.23,97.099 62.23,94.069 C58.1@63.119,93.18 ; U6.48@43.339,26.151 43.339,27.21 43.58,27.451 U6.1@44.639,27.451 45.828,27.451 46.355,26.924 46.355,26.035 44.958,24.638 C31.1@44.958,22.06 ; R15.2@43.637,89.585 42.799,90.423 42.799,92.202 43.434,92.837 45.847,92.837 49.53,96.52 49.53,98.679 ; U6.9@44.639,31.451 48.088,31.451 v1(48.641,32.004) ; C31.1@44.704,22.06 C30.1@46.152,22.06 ; R16.2@47.193,89.585 46.355,90.423 46.355,91.684 50.429,95.758 51.054,95.758 51.562,96.266 ; R17.2@50.952,89.598 50.038,90.513 50.038,92.202 52.197,94.361 52.197,95.631 51.562,96.266 ; 51.562,98.679 51.562,96.266 ; v1(56.896,14.351) R129.1@58.128,14.351 ; v1(58.42,25.146) R78.1@59.448,25.146 ; v1(67.945,24.765) 68.859,25.679 U9.8@70.083,25.679 72.707,25.679 R80.1@72.91,25.476 ; 71.12,25.679 71.209,25.769 71.209,27.229 C46.1@71.209,28.296 ; R42.2@76.682,20.701 76.962,20.981 v1(76.962,21.717) ; R39.2@82.896,12.802 82.921,12.827 v1(83.947,12.827) ; R40.2@82.905,16.5 82.915,16.51 v1(83.947,16.51) ; R37.2@82.908,6.162 v1(83.962,6.162) ; R38.2@82.908,9.591 v1(83.987,9.591) ; R41.2@82.908,19.7 83.932,19.7 v1(83.947,19.685) ; 28.829,98.171 33.706,98.171 J2.6@34.925,96.952 36.246,95.631 38.735,95.631
  Top Layer w0.5: U10.8@24.333,43.683 27.681,43.683 v1(27.94,43.942) ; 26.289,68.072 26.353,68.136 30.163,68.136 30.632,68.605 U3.20@30.632,70.035 ; v1(26.289,82.804) 26.289,66.421 27.94,64.77 v1(27.94,61.722) ; R1.2@27.051,88.354 R2.2@28.829,88.354 ; v1(27.686,84.201) 27.686,88.354 ; v1(35.56,20.701) 35.548,20.689 C16.2@35.548,18.847 36.347,18.047 U4.5@36.347,16.647 37.074,16.647 38.506,15.215 C17.2@38.506,12.955 C15.1@41.351,12.955 v1(43.307,12.954) 46.736,16.383 v1(47.752,16.383) ; C31.1@44.704,22.06 47.028,22.06 47.371,21.717 47.371,19.812 48.768,18.415 48.768,17.399 v1(47.752,16.383) ; J6.1@51.616,4.343 52.591,5.319 C19.1@52.591,8.915 ; R64.2@57.01,4.293 57.01,5.601 53.721,8.89 52.616,8.89 C19.1@52.591,8.915 ; U8.20@76.137,15.169 C41.1@76.137,17.348 ; v1(47.752,16.383) 52.591,11.544 C19.1@52.591,8.915
  Bottom Layer w0.5: v1(26.289,82.804) v1(27.686,84.201) ; v1(27.432,28.956) 27.94,28.956 ; v1(27.483,32.766) 27.94,32.766 ; v1(27.94,61.722) 27.94,28.321 29.083,27.178 ; 28.702,27.559 29.083,27.178 ; v1(35.56,19.812) v1(35.56,20.701) 29.083,27.178
  other v1: 42.418,12.954 76.124,16.18
24V: C1.1 C3.1 C47.1 C48.1 F1.1 Q13.2 Q14.2 Q15.2 Q16.2 R86.2 R87.2 R88.2 R89.2 R90.2 R91.2 R92.2 | length 64.7
  Top Layer w0.254: v1(15.113,30.353) 15.138,30.378 R92.2@21.514,30.378 ; R91.2@87.741,80.366 89.814,80.366 89.916,80.264 ; R88.2@87.766,26.899 89.814,26.899 90.17,26.543 ; R89.2@87.766,45.949 89.941,45.949 90.17,45.72 ; R90.2@87.817,65.303 90.018,65.303 90.17,65.151
  Top Layer w1.5: C47.1@76.327,50.873 C48.1@79.121,50.873
  Top Layer w2.5: 3.556,65.024 3.556,48.641 6.147,46.05 F1.1@6.147,29.591
  Bottom Layer w0.254: F1.1@6.147,29.591 6.909,30.353 v1(15.113,30.353)
  other v1: 89.865,25.73 90.729,25.73 91.592,25.73 89.865,26.543 90.729,26.543 91.592,26.543 89.789,45.237 90.653,45.237 91.516,45.237 89.789,46.05 90.653,46.05 91.516,46.05 77.724,50.444 77.724,51.308 3.175,63.881 3.988,63.881 3.175,64.745 3.988,64.745 89.84,65.049 90.703,65.049 91.567,65.049 3.175,65.608 3.988,65.608 89.84,65.862 90.703,65.862 91.567,65.862 89.789,79.908 90.653,79.908 91.516,79.908 89.789,80.721 90.653,80.721 91.516,80.721 85.547,86.03 86.36,86.03 85.547,86.893 86.36,86.893 85.547,87.757 86.36,87.757 90.094,90.703 90.957,90.703 91.821,90.703 90.094,91.516 90.957,91.516 91.821,91.516
ADC-H-IN: C25.1 R27.1 U10.3 | length 34.9
  Top Layer w0.254: R27.1@3.495,73.003 C25.1@4.917,73.003 4.917,69.759 9.271,65.405 13.589,65.405 18.796,60.198 18.796,52.578 19.812,51.562 19.888,51.486 21.488,51.486 21.793,51.181 U10.3@21.793,49.987
ADC-HEAD: C53.1 R118.2 U6.19 | length 35
  Top Layer w0.254: R118.2@24.562,54.445 C53.1@25.984,54.445 28.74,54.445 29.845,53.34 v1(29.845,42.545) ; v1@29.845,40.767 39.497,40.767 40.339,39.925 U6.19@40.339,34.251
  Bottom Layer w0.254: v1(29.718,40.64) 29.845,40.767 v1(29.845,42.545)
ADC-L: C61.1 R79.2 U6.10 | length 21.1
  Top Layer w0.254: U6.10@44.639,31.951 46.937,31.951 49.911,34.925 53.848,34.925 59.448,29.325 C61.1@59.448,27.991 R79.2@59.448,26.568
ADC-L-IN: C51.1 R116.2 U9.3 | length 28.1
  Top Layer w0.254: U9.3@63.83,23.139 v1(65.608,23.139) ; R116.2@85.899,33.973 C51.1@85.899,32.55 85.899,31.424 v1(85.903,31.42)
  Bottom Layer w0.254: v1(65.608,23.139) 77.622,23.139 v1(85.903,31.42)
ADC-R: C62.1 R81.1 U6.11 | length 34.5
  Top Layer w0.254: U6.11@44.639,32.451 46.675,32.451 49.657,35.433 54.229,35.433 59.436,30.226 72.136,30.226 72.91,29.452 C62.1@72.91,28.321 R81.1@72.91,26.899
ADC-R-IN: C52.1 R117.2 U9.5 | length 45.6
  Top Layer w0.254: v1(67.793,28.321) 66.802,27.33 66.802,23.876 68.809,21.869 U9.5@70.083,21.869 ; v1(84.557,45.288) 84.557,50.753 R117.2@85.592,51.789 C52.1@85.592,53.211
  Bottom Layer w0.254: v1(67.793,28.321) 70.46,30.988 77.978,30.988 84.557,37.567 v1(84.557,45.288)
ADC-W-IN: C44.1 R76.1 U10.5 | length 43.3
  Top Layer w0.254: U10.5@20.523,43.683 20.523,45.161 21.082,45.72 22.606,45.72 v1(29.083,52.197) ; v1(29.464,59.944) 29.464,63.246 30.48,64.262 38.826,64.262 R76.1@44.45,69.886 C44.1@45.872,69.886
  Bottom Layer w0.254: v1(29.083,52.197) 29.464,52.578 v1(29.464,59.944)
ADC-WING: C54.1 R122.1 U6.18 | length 22.7
  Top Layer w0.254: R122.1@24.765,41.021 C54.1@26.187,41.021 26.568,41.402 38.227,41.402 39.624,41.402 40.839,40.187 40.839,38.79 U6.18@40.839,34.251
DIR1N: R98.1 U1.2 U2.2 | length 34.3
  Top Layer w0.254: U2.2@58.242,46.761 58.242,47.955 58.801,48.514 60.706,48.514 v1(64.643,44.577) ; v1(66.04,43.053) 67.615,43.053 U1.2@67.64,43.078 ; v1(77.978,38.227) 78.689,37.516 R98.1@84.921,37.516
  Bottom Layer w0.254: v1(64.643,44.577) 66.04,43.18 v1(66.04,43.053) 67.437,43.053 72.22,38.27 77.935,38.27 v1(77.978,38.227)
DIR2N: R100.1 U1.10 U2.4 | length 64.7
  Top Layer w0.254: U2.4@55.702,46.761 55.702,47.574 57.658,49.53 79.629,49.53 ; U1.10@74.083,39.268 76.606,39.268 v1(77.851,40.513) ; v1(79.629,48.133) 79.629,49.53 ; R100.1@84.896,71.45 84.896,71.307 81.026,67.437 81.026,50.038 80.518,49.53 79.629,49.53
  Bottom Layer w0.254: v1(77.851,40.513) 78.74,40.513 79.629,41.402 v1(79.629,48.133)
DIR3N: R25.1 U2.6 U5.5 | length 52.4
  Top Layer w0.254: R25.1@15.343,69.7 15.343,68.502 16.485,67.361 20.803,67.361 33.198,54.966 v1@40.259,54.966 ; U5.5@39.599,51.105 39.599,52.705 v1@39.98,53.086 ; v1(52.578,48.641) 53.162,48.057 U2.6@53.162,46.761
  Bottom Layer w0.254: v1(40.259,54.991) 40.005,54.737 v1(40.005,53.086) 41.275,51.816 49.403,51.816 v1(52.578,48.641)
DIR4N: R51.1 U2.8 U5.10 | length 43.1
  Top Layer w0.254: v1@39.599,43.078 U5.10@39.599,44.662 ; v1(44.831,41.783) 46.609,41.783 49.149,44.323 49.149,56.388 49.657,56.896 57.785,65.024 R51.1@57.785,65.646 ; 49.022,44.196 51.892,41.326 U2.8@51.892,40.318
  Bottom Layer w0.254: v1(39.624,43.18) 40.132,43.688 42.926,43.688 v1(44.831,41.783)
DIR5N: R69.1 U2.10 U7.5 | length 40.8
  Top Layer w0.254: U2.10@54.432,40.318 v1(54.432,44.298) ; U7.5@59.893,58.776 59.944,58.826 59.944,59.817 v1(60.833,60.706) ; v1(67.437,60.833) 69.342,60.833 74.155,65.646 R69.1@74.244,65.646
  Bottom Layer w0.254: v1(54.432,44.298) 54.432,46.736 54.432,54.305 v1(60.833,60.706) 60.96,60.833 v1(67.437,60.833)
DIR-IO-1: R102.2 U1.4 U2.1 U6.29 | length 68.2
  Top Layer w0.254: U6.29@36.539,30.951 37.555,30.951 39.014,32.41 v1(41.453,32.41) ; U2.1@59.563,45.974 60.579,45.974 v1(64.389,42.164) ; v1(66.015,40.538) U1.4@67.64,40.538 69.063,40.538 71.12,38.481 71.12,33.528 74.041,30.607 81.661,30.607 82.753,29.515 R102.2@82.753,28.461
  Bottom Layer w0.254: v1(41.453,32.41) 41.453,33.452 43.18,35.179 47.117,35.179 55.118,43.18 59.436,43.18 59.817,43.561 62.992,43.561 v1(64.389,42.164) v1(66.015,40.538)
DIR-IO-2: R99.2 U1.12 U2.3 U6.39 | length 79.3
  Top Layer w0.254: U6.39@38.839,26.151 38.862,26.174 38.862,27.305 39.243,27.686 40.513,27.686 41.91,29.083 41.91,31.115 42.85,32.055 v1(42.85,32.537) ; v1(56.972,42.291) U2.3@56.972,46.761 56.972,47.955 58.039,49.022 73.787,49.022 75.819,46.99 v1(75.819,41.783) 75.794,41.808 U1.12@74.083,41.808 ; v1(77.724,41.783) 77.724,44.323 82.042,48.641 82.042,53.56 R99.2@84.972,56.49
  Bottom Layer w0.254: v1(42.85,32.537) 47.219,32.537 v1(56.972,42.291) ; v1(75.819,41.783) v1(77.724,41.783)
DIR-IO-3: R26.2 U2.5 U5.1 U6.20 | length 84.9
  Top Layer w0.254: R26.2@7.722,69.659 7.722,68.402 9.728,66.396 20.371,66.396 33.02,53.746 40.996,53.746 v1(41.529,53.213) ; v1(39.624,39.37) 39.839,39.155 U6.20@39.839,34.251 ; v1(44.628,53.238) 44.679,53.188 U5.1@44.679,51.105 ; v1(53.086,43.282) 53.086,44.704 54.432,46.05 U2.5@54.432,46.761 54.432,49.2 v1(53.213,50.419)
  Bottom Layer w0.254: v1(39.624,39.37) 49.174,39.37 v1(53.086,43.282) ; v1(41.529,53.213) 41.554,53.238 v1(44.628,53.238) 50.394,53.238 v1(53.213,50.419)
DIR-IO-4: R52.2 U2.9 U5.12 U6.21 | length 49.5
  Top Layer w0.254: v1(39.116,38.608) 39.339,38.385 U6.21@39.339,34.251 ; v1(41.529,42.672) 42.139,43.282 U5.12@42.139,44.662 42.139,46.203 42.672,46.736 47.371,46.736 v1(47.752,47.117) ; v1(47.752,49.53) 48.133,49.911 48.133,64.376 R52.2@49.403,65.646 ; v1(51.943,44.704) 51.943,43.307 53.111,42.139 53.111,40.369 U2.9@53.162,40.318
  Bottom Layer w0.254: v1(39.116,38.608) 38.862,38.862 38.862,39.878 v1@41.529,42.545 ; v1(47.752,49.53) v1(47.752,47.117) 50.927,47.117 51.943,46.101 v1(51.943,44.704)
DIR-IO-5: R70.2 U2.11 U6.22 U7.1 | length 55.7
  Top Layer w0.254: v1(38.608,37.211) 38.839,36.98 U6.22@38.839,34.251 ; v1(43.561,37.338) 44.704,38.481 55.372,38.481 55.702,38.811 U2.11@55.702,40.318 v1(55.702,44.348) ; v1(55.753,49.022) 55.753,52.959 58.107,55.313 64.33,55.313 64.973,55.956 U7.1@64.973,58.776 64.973,60.655 65.913,61.595 v1(65.913,62.865) ; v1(65.913,64.516) 65.913,65.544 R70.2@66.015,65.646
  Bottom Layer w0.254: v1(38.608,37.211) 38.735,37.338 v1(43.561,37.338) ; v1(55.702,44.348) 55.702,49.073 v1(55.753,49.022) ; v1(65.913,62.865) v1(65.913,64.516)
ENC-HEAD-A: U3.5 U6.35 | length 37.8
  Top Layer w0.254: v1(32.639,29.972) 34.66,27.951 U6.35@36.539,27.951 ; v1(35.687,59.944) 35.712,59.969 U3.5@35.712,61.435
  Bottom Layer w0.254: v1(32.639,29.972) 32.258,30.353 32.258,39.116 35.687,42.545 v1(35.687,59.944)
ENC-HEAD-A1: C9.1 J2.5 R4.1 U3.15 | length 30.8
  Top Layer w0.254: J2.5@32.385,97.003 J2.5@32.385,96.952 32.385,96.52 35.814,93.091 R4.1@35.814,89.98 ; R4.1@36.068,89.98 R4.1@35.992,89.904 C9.1@37.414,89.904 38.354,88.964 38.354,76.835 38.354,74.818 36.982,73.446 U3.15@36.982,70.035
ENC-HEAD-B: U3.4 U6.36 | length 39.2
  Top Layer w0.254: v1(31.623,29.718) 33.89,27.451 U6.36@36.539,27.451 ; v1(34.417,59.944) 34.442,59.969 U3.4@34.442,61.435
  Bottom Layer w0.254: v1@31.496,29.718 31.496,39.37 34.925,42.799 34.925,59.436 v1(34.417,59.944)
ENC-HEAD-B1: C8.1 J2.4 R3.1 U3.16 | length 30.2
  Top Layer w0.254: J2.4@29.845,97.003 29.845,94.107 32.36,91.592 R3.1@32.36,89.904 C8.1@33.782,89.904 33.782,89.741 34.559,88.964 34.559,78.09 35.712,76.937 U3.16@35.712,70.035
ENC-L-A: U6.33 U8.5 | length 40
  Top Layer w0.254: U6.33@36.539,28.951 40.635,28.951 v1(40.767,29.083) ; v1(53.721,20.066) 54.356,20.066 56.261,18.161 59.309,18.161 65.151,12.319 65.151,10.795 65.913,10.033 U8.5@67.48,10.033
  Bottom Layer w0.254: v1(40.767,29.083) 41.021,29.337 43.688,29.337 52.959,20.066 v1(53.721,20.066)
ENC-L-A-J: C33.1 J7.2 R37.1 U8.15 | length 36
  Top Layer w0.254: U8.15@76.08,8.763 78.994,8.763 81.358,6.399 R37.1@81.358,6.162 ; C33.1@81.358,4.739 R37.1@81.358,6.162 ; J7.2@106.731,12.628 103.179,12.628 100.584,10.033 88.646,10.033 85.852,7.239 82.435,7.239 R37.1@81.358,6.162
ENC-L-B: U6.32 U8.4 | length 39.2
  Top Layer w0.254: U6.32@36.539,29.451 39.611,29.451 v1(40.132,29.972) ; v1(54.61,20.828) 56.642,18.796 59.563,18.796 65.913,12.446 65.913,11.938 66.548,11.303 U8.4@67.48,11.303
  Bottom Layer w0.254: v1(40.132,29.972) 43.942,29.972 53.086,20.828 54.102,20.828 v1(54.61,20.828)
ENC-L-B-J: C34.1 J7.3 R38.1 U8.16 | length 34.3
  Top Layer w0.254: U8.16@76.08,10.033 78.867,10.033 79.309,9.591 R38.1@81.358,9.591 ; C34.1@81.358,8.168 R38.1@81.358,9.591 ; J7.3@106.731,14.628 104.417,14.628 100.33,10.541 82.308,10.541 R38.1@81.358,9.591
ENC-R-A: U6.31 U8.3 | length 38.8
  Top Layer w0.254: U6.31@36.539,29.951 38.714,29.951 39.497,30.734 v1(40.894,30.734) ; v1(53.721,21.717) 54.737,21.717 57.023,19.431 59.944,19.431 66.802,12.573 U8.3@67.48,12.573
  Bottom Layer w0.254: v1(40.894,30.734) 44.069,30.734 53.086,21.717 v1(53.721,21.717)
ENC-R-A-J: C36.1 J7.5 R40.1 U8.17 | length 35.8
  Top Layer w0.254: U8.17@76.08,11.303 76.962,11.303 80.518,14.859 C36.1@81.407,14.859 ; R40.1@81.355,16.5 C36.1@81.355,15.077 82.208,14.224 102.108,14.224 106.512,18.628 J7.5@106.731,18.628
ENC-R-B: U6.30 U8.2 | length 38.8
  Top Layer w0.254: U6.30@36.539,30.451 37.817,30.451 38.964,31.598 v1(40.564,31.598) ; v1(54.737,22.606) 57.277,20.066 60.325,20.066 66.548,13.843 U8.2@67.48,13.843
  Bottom Layer w0.254: v1(40.564,31.598) 44.094,31.598 53.086,22.606 v1(54.737,22.606)
ENC-R-B-J: C37.1 J7.6 R41.1 U8.18 | length 40.7
  Top Layer w0.254: U8.18@76.08,12.573 77.089,12.573 78.74,14.224 78.74,17.272 79.238,17.77 80.85,17.77 C37.1@81.358,18.278 ; R41.1@81.358,19.7 C37.1@81.358,18.278 ; J7.6@106.731,20.628 105.537,19.434 105.537,18.542 101.727,14.732 86.868,14.732 84.201,17.399 82.236,17.399 C37.1@81.358,18.278
ENC-W-L: U3.7 U6.40 | length 45.9
  Top Layer w0.254: v1(36.957,23.749) 38.608,23.749 39.339,24.48 U6.40@39.339,26.151 ; v1(38.227,59.944) 38.252,59.969 U3.7@38.252,61.435
  Bottom Layer w0.254: v1(36.957,23.749) 35.814,23.749 33.782,25.781 33.782,38.608 37.211,42.037 37.211,55.753 38.227,56.769 v1(38.227,59.944)
ENC-W-L1: C22.1 J3.3 R15.1 U3.13 | length 35.5
  Top Layer w0.254: U3.13@39.522,70.035 39.522,83.591 42.545,86.614 45.339,86.614 45.862,87.137 45.862,90.409 45.136,91.135 C22.1@45.085,91.135 ; R15.1@43.637,91.135 C22.1@45.085,91.135 ; J3.3@50.952,97.003 C22.1@45.085,91.135
ENC-W-R: U3.9 U6.41 | length 47.4
  Top Layer w0.254: v1(35.306,26.543) 35.306,24.13 36.449,22.987 39.243,22.987 39.839,23.583 U6.41@39.839,26.151 ; v1(40.767,59.944) 40.792,59.969 U3.9@40.792,61.435
  Bottom Layer w0.254: v1(35.306,26.543) 35.306,27.94 35.306,38.1 38.735,41.529 38.735,55.245 40.767,57.277 v1(40.767,59.944)
ENC-W-R1: C24.1 J4.3 R17.1 U3.11 | length 49.3
  Top Layer w0.254: U3.11@42.062,70.035 42.062,82.829 44.831,85.598 50.419,85.598 53.34,88.519 53.34,90.183 C24.1@52.375,91.148 ; R17.1@50.952,91.148 C24.1@52.375,91.148 ; C24.1@52.324,91.199 C24.1@52.375,91.148 ; v1(52.959,94.107) 52.375,93.523 C24.1@52.375,91.148
  Bottom Layer w0.254: v1(52.959,94.107) 64.008,94.107 65.996,96.095 J4.3@65.996,97.333 J4.3@65.996,97.384
FAULT: D3.1 D4.1 Q25.3 R129.2 U6.4 | length 31.5
  Top Layer w0.254: U6.4@44.639,28.951 47.122,28.951 49.403,26.67 49.403,21.209 54.483,16.129 58.166,16.129 59.678,14.617 R129.2@59.678,14.351 58.75,13.424 D4.1@58.75,12.751 D3.1@58.75,11.379 57.117,9.746 Q25.3@57.117,8.369